# Altium PCB VLP.PcbDoc
Units mil, origin at the board's own origin, x right, y up, seen from the top; angles counter-clockwise.
Board outline 1968.5 x 1968.5 mil, 2 copper layers (Top Layer, Bottom Layer); 41 components, 41 nets, 190 pads, 40 vias.
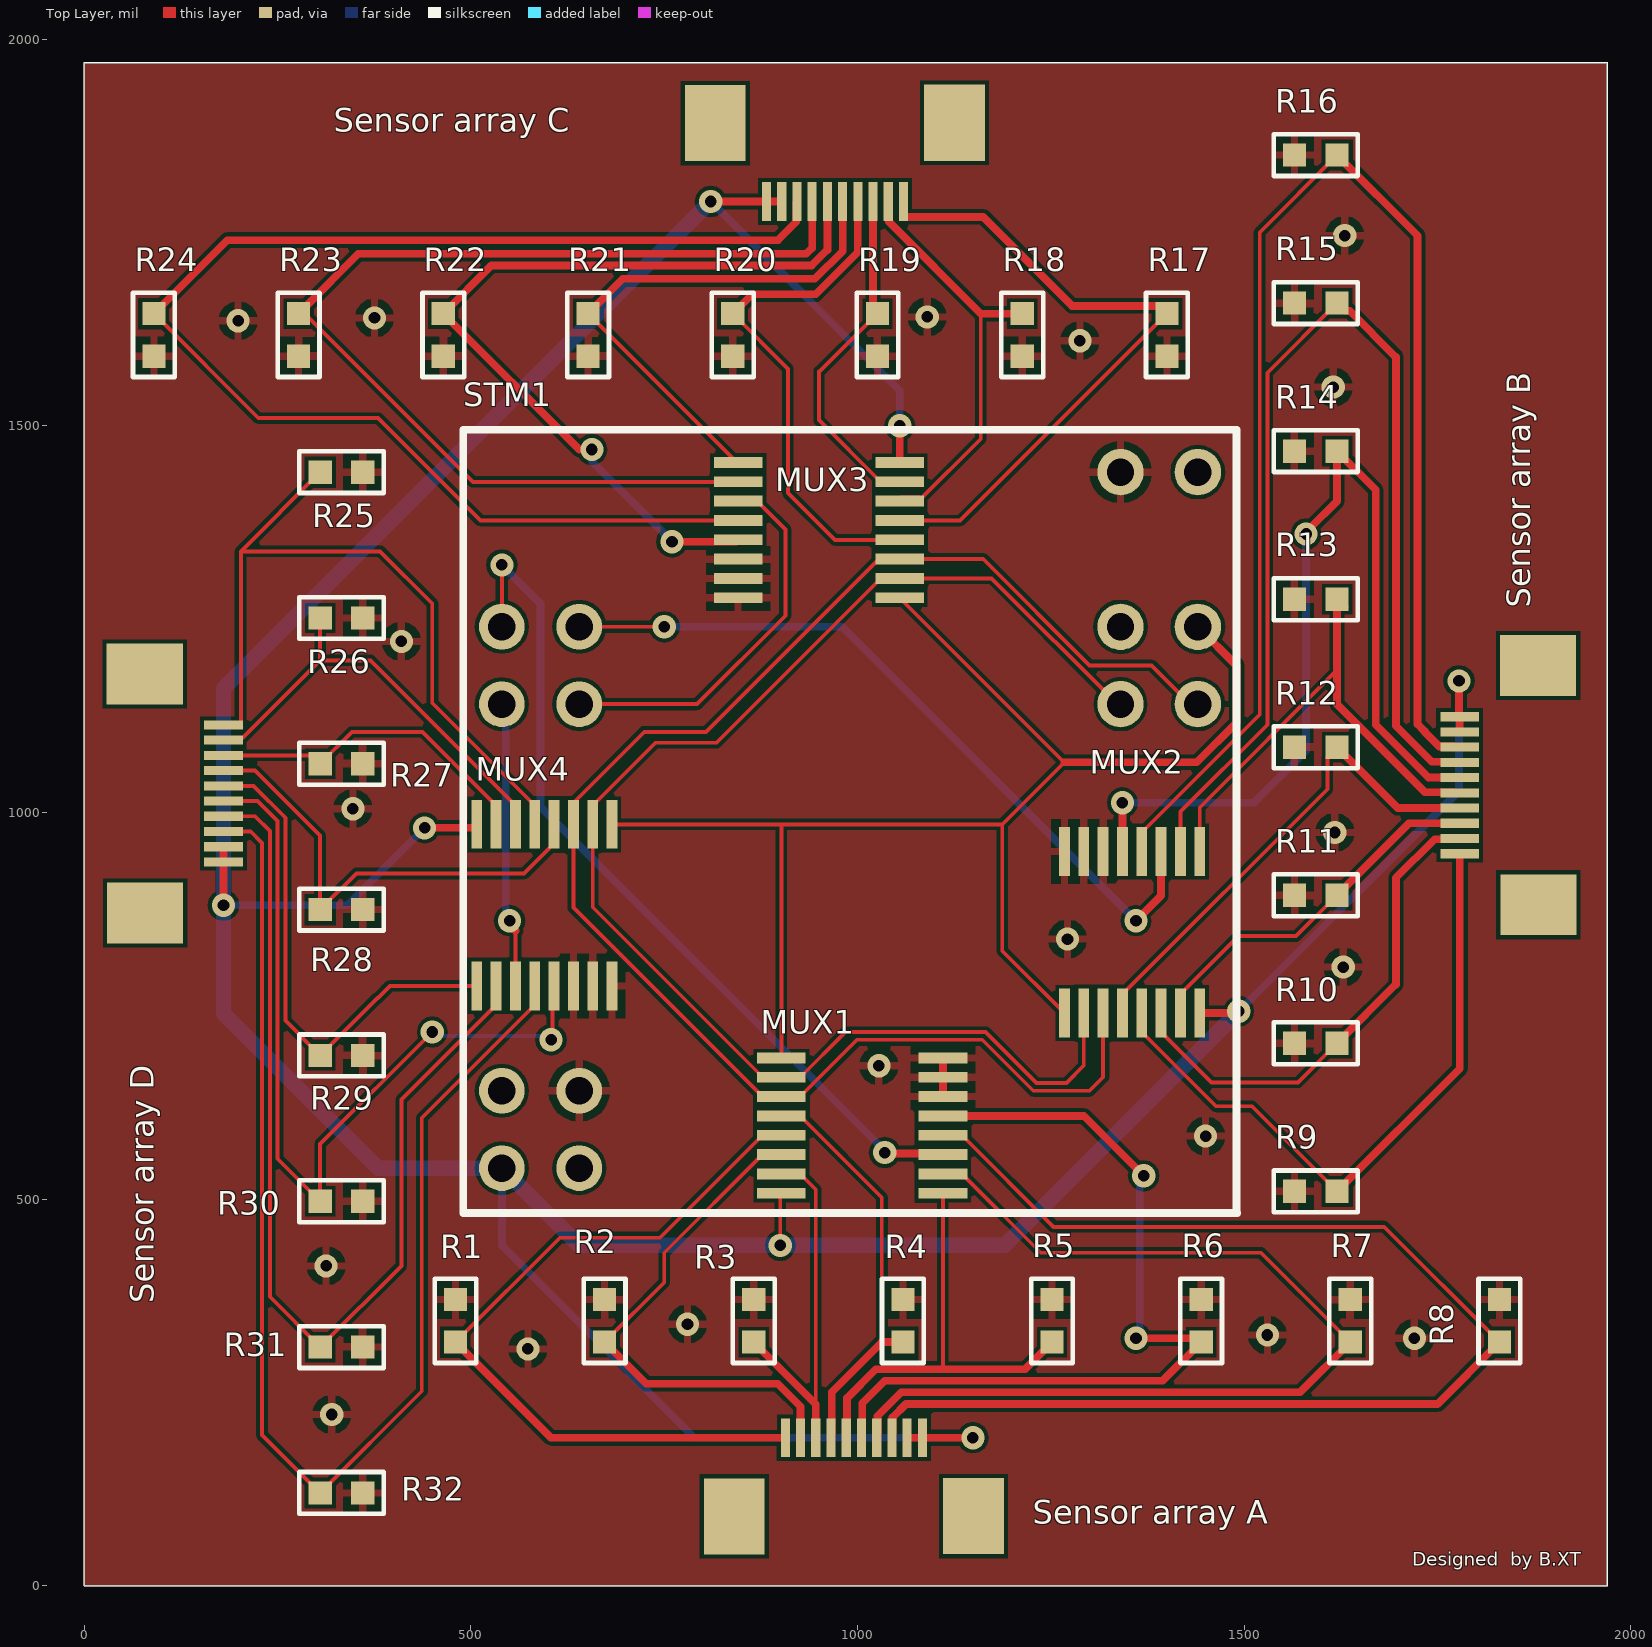
[diagram p0: Top Layer view]
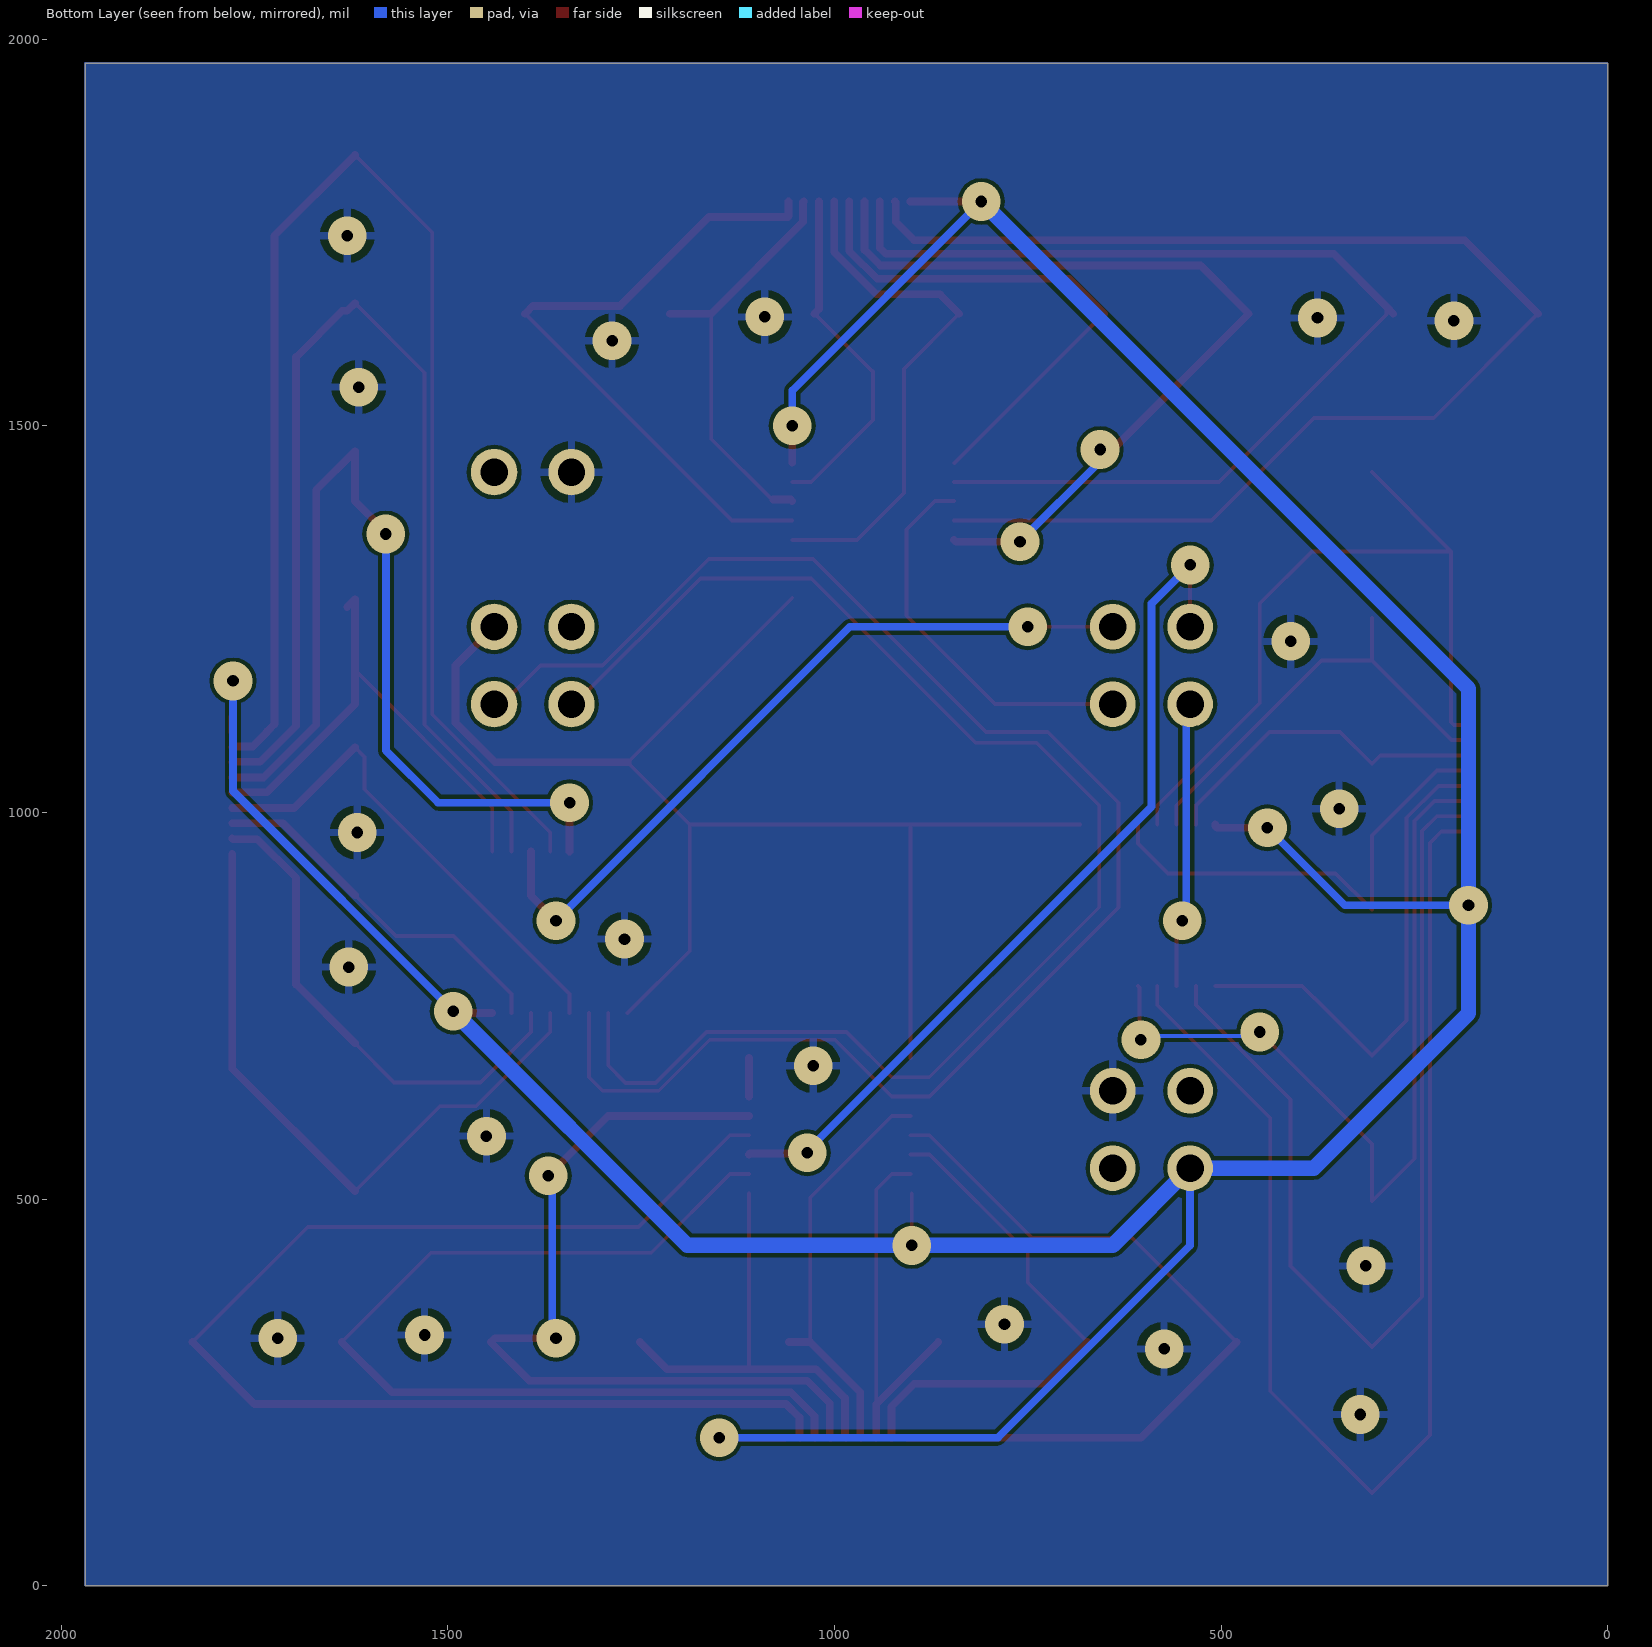
[diagram p1: Bottom Layer view, seen from below]
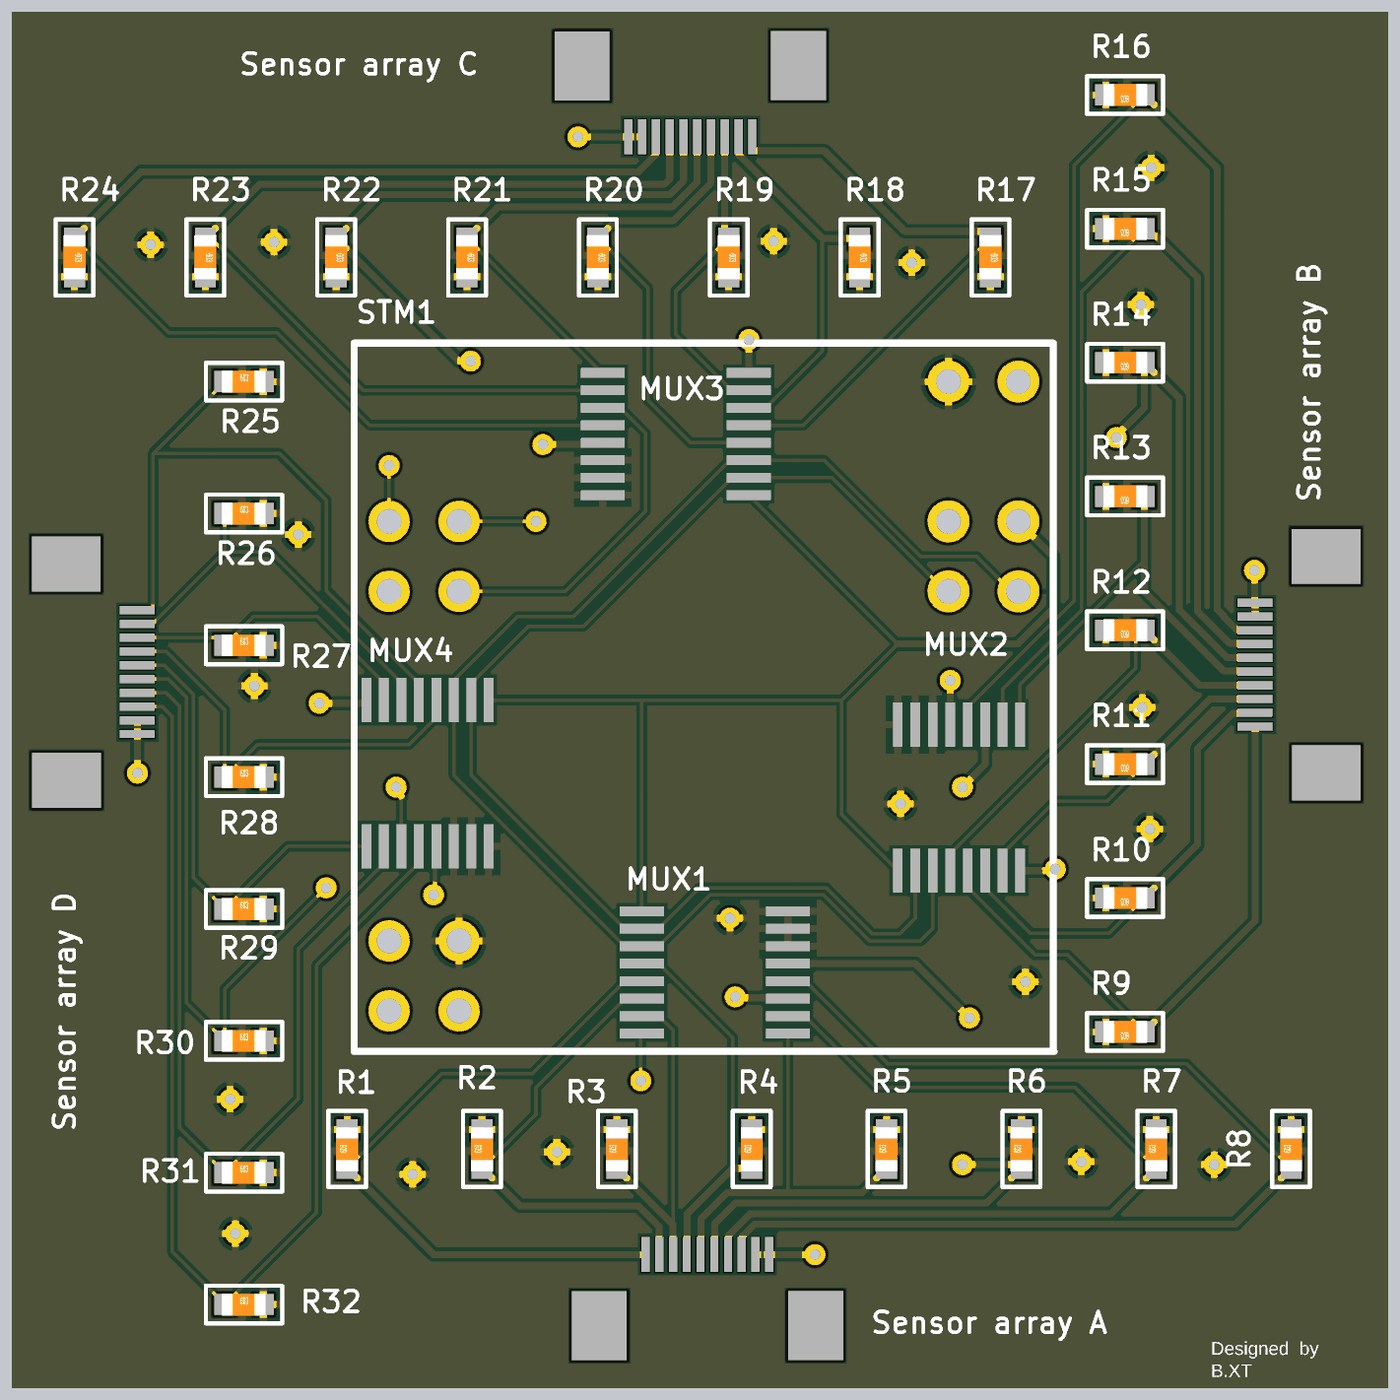
[diagram p2: 3D render of the assembled board from above, using the file's embedded part models]

## Layer stack, top to bottom
Top Solder: solder mask 0.4, Solder Resist, Dk 3.5
Top Layer: signal copper 1.4
Dielectric 1: dielectric 12.6, FR-4, Dk 4.8
Bottom Layer: signal copper 1.4
Bottom Solder: solder mask 0.4, Solder Resist, Dk 3.5

## Board outline
0,0 1968.5,0 1968.5,1968.5 0,1968.5

## Design rules (kind name [scope] priority, off if disabled: settings)
Clearance [All] p1: gap=5 ignorepadtopadclearanceinfootprint=FALSE
MinimumSolderMaskSliver [All] p1: minsoldermaskwidth=2
PolygonConnect [All] p1: connectstyle=Relief reliefconductorwidth=10 reliefentries=4 polygonreliefangle="90 Angle" airgapwidth=10
RoutingVias [All] p1: holewidth=28 width=50 viastyle="Through Hole" minholewidth=28 minwidth=50 maxholewidth=28 maxwidth=50
SilkToSilkClearance [All] p1: silktosilkclearance=3
SilkToSolderMaskClearance [IsPad] p1: minsilkscreentomaskgap=5 clearancetoexposedcopper=TRUE
SolderMaskExpansion [All] p1: expansion=4
Width [All] p1: maxlimit=20 minlimit=5 preferedwidth=10
27 further rules are at their usual default settings.

## Components (designator, comment, footprint, x,y, rotation, side; value= is the part's Value field where it differs from the comment)
MUX1 "MAX4581" MAX4581 1005.91,590 r180 top locked
MUX2 "MAX4581" MAX4581 1360,845 r270 top
MUX3 "MAX4581" MAX4581 950,1370 r0 top locked
MUX4 "MAX4581" MAX4581 590,880 r90 top locked
R1 "Res2" 0603c 480,315 r90 top value=10K
R2 "Res2" 0603c 672.86,315 r90 top value=10K
R3 "Res2" 0603c 865.71,315 r90 top value=10K
R4 "Res2" 0603c 1058.57,315 r90 top value=10K
R5 "Res2" 0603c 1251.43,315 r90 top value=10K
R6 "Res2" 0603c 1444.29,315 r90 top value=10K
R7 "Res2" 0603c 1637.14,315 r90 top value=10K
R8 "Res2" 0603c 1830,315 r90 top value=10K
R9 "Res2" 0603c 1620,510 r180 top value=10K
R10 "Res2" 0603c 1620,701.43 r180 top value=10K
R11 "Res2" 0603c 1620,892.86 r180 top value=10K
R12 "Res2" 0603c 1620,1084.29 r180 top value=10K
R13 "Res2" 0603c 1620,1275.71 r180 top value=10K
R14 "Res2" 0603c 1620,1467.14 r180 top value=10K
R15 "Res2" 0603c 1620,1658.57 r180 top value=10K
R16 "Res2" 0603c 1620,1850 r180 top value=10K
R17 "Res2" 0603c 1400,1645 r270 top value=10K
R18 "Res2" 0603c 1212.86,1645 r270 top value=10K
R19 "Res2" 0603c 1025.71,1645 r270 top value=10K
R20 "Res2" 0603c 838.57,1645 r270 top value=10K
R21 "Res2" 0603c 651.43,1645 r270 top value=10K
R22 "Res2" 0603c 464.29,1645 r270 top value=10K
R23 "Res2" 0603c 277.14,1645 r270 top value=10K
R24 "Res2" 0603c 90,1645 r270 top value=10K
R25 "Res2" 0603c 305,1440 r0 top value=10K
R26 "Res2" 0603c 305,1251.43 r0 top value=10K
R27 "Res2" 0603c 305,1062.86 r0 top value=10K
R28 "Res2" 0603c 305,874.29 r0 top value=10K
R29 "Res2" 0603c 305,685.71 r0 top value=10K
R30 "Res2" 0603c 305,497.14 r0 top value=10K
R31 "Res2" 0603c 305,308.57 r0 top value=10K
R32 "Res2" 0603c 305,120 r0 top value=10K
"Sensor array A" "FPC连接件" FPC连接器-10P 1194.09,7.72 r90 top locked
"Sensor array B" "FPC连接件" FPC连接器-10P 1962.28,1234.09 r180 top locked
"Sensor array C" "FPC连接件" FPC连接器-10P 771.85,1973.7 r270 top locked
"Sensor array D" "FPC连接件" FPC连接器-10P -3.7,825.59 r0 top locked
STM1 "MCU" STM32F103C8T6-4 540,1440 r0 top locked

## Footprints (in the part's own frame and the unit in brackets; to place one, negate y for a bottom-side part, rotate by r counter-clockwise, add the part's x,y. Pads: shape width x height; smd on the part's side, far side on the other; paste and mask are expansions set on the pad)
0603c [mil]
  rect 30x30 smd: 1(0,0) 2(55,0)
  silkscreen extent -27,-27 82,27, body extent -4,-16 59,16, height 12
FPC连接器-10P [mm]
  rect 1.27x0.3 smd mask+0.05: 1(4.666,7.303) 2(4.666,6.803) 3(4.666,6.303) 4(4.666,5.803) 5(4.666,5.303) 6(4.666,4.803) 7(4.666,4.303) 8(4.666,3.803) 9(4.666,3.303) 10(4.666,2.803)
  rect 2.5x2 smd: ""(2.08,8.98) ""(2.09,1.12)
MAX4581 [mil]
  rect 63x14 smd paste+0 mask+0: 1(-104.5,82.5) 2(-104.5,57.5) 3(-104.5,32.5) 4(-104.5,7.5) 5(-104.5,-17.5) 6(-104.5,-42.5) 7(-104.5,-67.5) 8(-104.5,-92.5) 9(104.5,-92.5) 10(104.5,-67.5) 11(104.5,-42.5) 12(104.5,-17.5) 13(104.5,7.5) 14(104.5,32.5) 15(104.5,57.5) 16(104.5,82.5)
STM32F103C8T6-4 [mm]
  round 1.5 hole 0.9: 5(0,-5.08) 6(2.54,-5.08) 7(0,-7.62) 8(2.54,-7.62) 17(0,-20.32) 18(2.54,-20.32) 19(0,-22.86) 20(2.54,-22.86)
  round 1.524 hole 0.899: 33(22.86,-7.62) 34(20.32,-7.62) 35(22.86,-5.08) 36(20.32,-5.08) 39(22.86,0) 40(20.32,0)
  silkscreen extent -1.27,-24.33 24.16,1.4

## Part data
R1 R2 R3 R4 R5 R6 R7 R8 R9 R10 R11 R12 R13 R14 R15 R16 R17 R18 R19 R20 R21 R22 R23 R24 R25 R26 R27 R28 R29 R30 R31 R32: "Resistor", LatestRevisionDate=17-Jul-2002, LatestRevisionNote="Re-released for DXP Platform.", PackageDescription="Axial Device, Thru-Hole; 2 Leads; 0.4 in Pin Spacing", PackageReference=AXIAL-0.4, Published=8-Jun-2000, Publisher="Altium Limited"
STM1: library part Component_1
MUX1 MUX2 MUX3 MUX4: MUX=MAX4581

## Via types
v1: diameter 30/50 (per signal layer), hole 15, Top Layer to Bottom Layer, 40 vias

## Nets (pads, with @x,y where several pads share a name; then routed paths per layer and width w, separated by ;. In a path a pad name is that pad's centre, name@x,y a point inside that pad or via, vN(x,y) a via of type N, cw(c..) or ccw(c..) an arc to the next point about the centre after c; other vN are vias at no path point)
+5V: "Sensor array A.9" "Sensor array A.10" "Sensor array B.9" "Sensor array B.10" "Sensor array C.9" "Sensor array C.10" "Sensor array D.9" "Sensor array D.10" MUX1.16 MUX2.16 MUX3.16 MUX4.16 STM1.19 | length 5510.1
  Top Layer w5: v1(900,440) MUX1.16@900,507.5
  Top Layer w10: v1(180,880) 180,935.94 180,955.63 ; v1(440,980) 505.5,980 507.5,982 MUX4.16 ; STM1.19 STM1.19@540,560 ; v1(810,1790) 882.2,1790 901.89,1790 ; MUX3.16 v1(1054.5,1500) ; 1064.06,191.42 1083.74,191.42 v1(1149.09,191.42) ; MUX2.16 1490.5,740.5 v1(1492.88,742.88) ; v1(1777.68,1170) 1777.68,1124.65 1778.58,1123.74 1778.58,1104.06 1778.13,1104.51
  Bottom Layer w10: v1(180,880) 340,880 v1(440,980) ; STM1.19@540,550 STM1.19 540,440 788.58,191.42 v1(1149.09,191.42) ; v1(810,1790) 1054.5,1545.5 v1(1054.5,1500) ; v1(1492.88,742.88) 1777.68,1027.68 v1(1777.68,1170)
  Bottom Layer w20: v1(810,1790) 180,1160 v1(180,880) 180,740 380,540 STM1.19 640,440 v1(900,440) 1190,440 v1(1492.88,742.88)
A: MUX1.11 MUX2.11 MUX3.11 MUX4.11 STM1.33 | length 2085.5
  Top Layer w5: MUX2.11 1317.5,657.5 1300,640 1227.13,640 1161.13,706 999.41,706 925.91,632.5 MUX1.11 876.91,632.5 632.5,876.91 MUX4.11 632.5,1012.5 724.06,1104.06 804.06,1104.06 1027.5,1327.5 MUX3.11 1162.5,1327.5 1300,1190 1380,1190 1430,1140 STM1.33
B: MUX1.10 MUX2.10 MUX3.10 MUX4.10 STM1.34 | length 1858
  Top Layer w5: MUX2.10 1292.5,672.5 1270,650 1231.27,650 1165.27,716 984.41,716 925.91,657.5 MUX1.10 877.3,657.5 657.5,877.3 MUX4.10 657.5,1009 738.5,1090 817.5,1090 1030,1302.5 MUX3.10 1173.36,1302.5 1335.86,1140 STM1.34
C: MUX1.9 MUX2.9 MUX3.9 MUX4.9 STM1.35 | length 1887.5
  Top Layer w5: MUX4.9 900,984.5 ; MUX1.9 901.41,983.09 900,984.5 ; MUX3.9 1267.31,1064.69 1187.13,984.5 ; MUX2.9 1187.13,820.87 1187.13,984.5 ; 900,984.5 1187.13,984.5
  Top Layer w10: 1267.31,1064.69 1438.65,1064.69 1490,1116.04 1490,1190 STM1.35
GND: MUX1.6 MUX1.7 MUX1.8 MUX2.6 MUX2.7 MUX2.8 MUX3.6 MUX3.7 MUX3.8 MUX4.6 MUX4.7 MUX4.8 R1.2 R2.2 R3.2 R4.2 R5.2 R6.2 R7.2 R8.2 R9.2 R10.2 R11.2 R12.2 R13.2 R14.2 R15.2 R16.2 R17.2 R18.2 R19.2 R20.2 R21.2 R22.2 R23.2 R24.2 R25.2 R26.2 R27.2 R28.2 R29.2 R30.2 R31.2 R32.2 STM1.18 STM1.40 | length 50
  Top Layer w10: MUX1.6 MUX1.7 MUX1.8
  other v1: 320,221.42 573.64,306.16 1720,320 1530,324.19 780,338.19 312.65,413.57 1450,581.4 1027.5,672.5 1627.96,800 1271.43,836.18 1617.14,974 347.35,1004.7 410,1221.16 1615.15,1550 1287.5,1609.97 198.84,1635.81 375.31,1639.42 1090,1640.81 1630,1745.86
SA: MUX1.3 STM1.5 | length 1119
  Top Layer w5: STM1.5 v1(540,1320)
  Top Layer w10: v1(1035,560) 1036.25,558.75 1109.16,558.75 MUX1.3
  Bottom Layer w10: v1(540,1320) 590,1270 590,1007.5 v1@1035,562.5
SA1: "Sensor array A.1" MUX1.13 R1.1 | length 1010
  Top Layer w5: R1.1 615,450 744.41,450 876.91,582.5 MUX1.13
  Top Layer w10: R1.1 603.58,191.42 906.58,191.42
SA2: "Sensor array A.2" MUX1.14 R2.1 | length 679.5
  Top Layer w5: R2.1 750,392.14 750,430.59 876.91,557.5 MUX1.14
  Top Layer w10: R2.1 726.72,261.14 896.54,261.14 926.26,231.42 926.26,191.42
SA3: "Sensor array A.3" MUX1.15 R3.1 | length 487.3
  Top Layer w5: MUX1.15 925.91,532.5 945.95,512.46 945.95,234.77
  Top Layer w10: R3.1 945.95,234.77 945.95,191.42
SA4: "Sensor array A.4" MUX1.12 R4.1 | length 538.7
  Top Layer w5: MUX1.12 925.91,607.5 1031.22,502.19 1031.22,315
  Top Layer w10: 965.63,191.42 966.54,192.32 966.54,250.31 1031.22,315 R4.1
SA5: "Sensor array A.5" MUX1.1 R5.1 | length 574.4
  Top Layer w5: 1110,280 1110.41,280.41 MUX1.1
  Top Layer w10: 985.32,191.42 986.22,192.32 986.22,242.56 1023.66,280 1110,280 1216.43,280 R5.1
SA6: "Sensor array A.6" MUX1.5 R6.1 | length 1108.2
  Top Layer w10: 1005,191.42 1005.91,192.32 1005.91,235.91 1035,265 1394.29,265 R6.1 1439.29,320 v1(1360,320) ; MUX1.5 1292.5,607.5 v1(1370,530)
  Bottom Layer w10: v1(1360,320) 1365,325 1365,525 v1(1370,530)
SA7: "Sensor array A.7" MUX1.2 R7.1 | length 1296.2
  Top Layer w5: MUX1.2 1134.91,532.5 1236.81,430.59 1521.55,430.59 R7.1
  Top Layer w10: 1024.69,191.42 1025.59,192.32 1025.59,219.21 1056.38,250 1572.14,250 R7.1
SA8: "Sensor array A.8" MUX1.4 R8.1 | length 1682.1
  Top Layer w5: MUX1.4 1134.91,582.5 1253.41,464 1681,464 R8.1
  Top Layer w10: 1044.37,191.42 1045.28,192.32 1045.28,217.69 1062.59,235 1750,235 R8.1
SB: MUX2.3 STM1.6 | length 980.4
  Top Layer w5: STM1.6 v1(750,1240)
  Top Layer w10: v1(1360,860) 1392.5,892.5 MUX2.3
  Bottom Layer w10: v1(750,1240) 980,1240 v1(1360,860)
SB1: "Sensor array B.1" MUX2.13 R9.1 | length 864.6
  Top Layer w5: MUX2.13 1367.5,716 1463.5,620 1510,620 R9.1
  Top Layer w10: R9.1 1778.58,668.58 1778.58,946.58
SB2: "Sensor array B.2" MUX2.14 R10.1 | length 649
  Top Layer w5: MUX2.14 1392.5,716 1457.79,650.71 1569.29,650.71 R10.1
  Top Layer w10: R10.1 1696.16,777.59 1696.16,915.3 1746.21,965.35 1777.68,965.35 1778.58,966.26
SB3: "Sensor array B.3" MUX2.15 R11.1 | length 477.1
  Top Layer w5: MUX2.15 1417.5,765 1492.5,840 1567.14,840 R11.1
  Top Layer w10: R11.1 1713.09,985.95 1778.58,985.95
SB4: "Sensor array B.4" MUX2.12 R12.1 | length 649.9
  Top Layer w5: MUX2.12 1342.5,765 1607.5,1030 1607.5,1071.79 R12.1
  Top Layer w10: R12.1 1698.66,1005.63 1778.58,1005.63
SB5: "Sensor array B.5" MUX2.1 R13.1 | length 664
  Top Layer w5: MUX2.1 1442.5,1006.55 1620,1184.05
  Top Layer w10: R13.1@1630,1265.71 R13.1 1620,1184.05 1620,1180 1620,1140 1733.78,1026.22 1777.68,1026.22 1778.58,1025.32
SB6: "Sensor array B.6" MUX2.5 R14.1 | length 1236.2
  Top Layer w10: MUX2.5 v1(1342.5,1012.5) ; v1@1583.42,1365.92 1620,1402.5 R14.1 1670,1417.14 1670,1113.42 1738.42,1045 1778.58,1045
  Bottom Layer w10: v1(1342.5,1012.5) 1512.5,1012.5 1580,1080 v1(1580,1360)
SB7: "Sensor array B.7" MUX2.2 R15.1 | length 1476.9
  Top Layer w5: MUX2.2 1417.5,1000.92 1530,1113.42 1530,1568.57 R15.1
  Top Layer w10: R15.1 1630,1648.57 1636.43,1648.57 1696.16,1588.84 1696.16,1111.91 1742.47,1065.59 1777.68,1065.59 1778.58,1064.69
SB8: "Sensor array B.8" MUX2.4 R16.1 | length 1851.3
  Top Layer w5: MUX2.4 1367.5,974 1520,1126.5 1520,1750 R16.1
  Top Layer w10: R16.1 1724.14,1745.86 1724.14,1114.14 1733.78,1104.51 1733.78,1103.81 1752.31,1085.28 1777.68,1085.28 1778.58,1084.37
SC: MUX4.3 STM1.7 | length 371.7
  Top Layer w5: MUX4.3 v1@557.5,847.09
  Top Layer w10: v1(550,860) 550,854.59 v1@557.5,847.09
  Bottom Layer w10: STM1.7 545,1135 545,865 v1(550,860)
SC1: "Sensor array D.1" MUX4.13 R25.1 | length 1005.7
  Top Layer w5: 180,1113.11 199.09,1113.11 202.5,1116.52 202.5,1337.5 ; R25.1 202.5,1337.5 ; MUX4.13 582.5,1009 450,1141.5 450,1270 382.5,1337.5 202.5,1337.5
SC2: "Sensor array D.2" MUX4.14 R26.1 | length 577.3
  Top Layer w5: 180,1093.42 201.83,1093.42 305,1196.6 ; R26.1 305,1196.6 ; MUX4.14 557.5,1009 369.9,1196.6 305,1196.6
SC3: "Sensor array D.3" MUX4.15 R27.1 | length 437.9
  Top Layer w5: 180,1073.74 294.12,1073.74 R27.1 346.2,1104.06 437.44,1104.06 532.5,1009 MUX4.15
SC4: "Sensor array D.4" MUX4.12 R28.1 | length 618
  Top Layer w5: 180,1054.05 220.95,1054.05 305,970 R28.1 351.86,921.14 568.64,921.14 607.5,960 MUX4.12
SC5: "Sensor array D.5" MUX4.1 R29.1 | length 662.8
  Top Layer w5: 180,1034.37 218.64,1034.37 260,993.01 260,730.71 R29.1 379.29,760 380,760 395.5,775.5 MUX4.1
SC6: "Sensor array D.6" MUX4.5 R30.1 | length 1103
  Top Layer w5: 180,1014.68 224.18,1014.68 250,988.87 250,552.14 R30.1 305,571 v1(450,716) ; v1(603.58,706) 605.54,707.96 605.54,773.54 MUX4.5
  Bottom Layer w5: v1(450,716) 455,711 598.58,711 v1(603.58,706)
SC7: "Sensor array D.7" MUX4.2 R31.1 | length 1323.4
  Top Layer w5: 180,995 220.95,995 240,975.95 240,373.57 R31.1 410,413.57 410,628.5 532.5,751 MUX4.2
SC8: "Sensor array D.8" MUX4.4 R32.1 | length 1698.2
  Top Layer w5: 180,975.31 215.23,975.31 230,960.55 230,195 R32.1 436.43,251.43 436.43,604.93 582.5,751 MUX4.4
SD: MUX3.3 STM1.8 | length 501.7
  Top Layer w5: STM1.8 792.2,1140 906.58,1254.37 906.58,1365.92 870,1402.5 MUX3.3
SD1: "Sensor array C.1" MUX3.13 R17.1 | length 868.2
  Top Layer w5: MUX3.13 1132.5,1377.5 R17.1
  Top Layer w10: 1059.37,1790 1059.37,1770.91 1060.28,1770 1162.32,1770 1277.32,1655 1390,1655 R17.1
SD2: "Sensor array C.2" MUX3.14 R18.1 | length 573.7
  Top Layer w5: MUX3.14 1079,1402.5 1159.32,1482.82 1159.32,1645
  Top Layer w10: 1039.68,1790 1040.59,1789.09 1040.59,1763.73 1159.32,1645 R18.1 ; MUX3.14 1056.5,1404.5 MUX3.14@1079,1404.5
SD3: "Sensor array C.3" MUX3.15 R19.1 | length 454.3
  Top Layer w5: R19.1 950.71,1570 950,1570 950,1507.5 1030,1427.5 MUX3.15
  Top Layer w10: 1020,1790 1020,1650.71 R19.1
SD4: "Sensor array C.4" MUX3.12 R20.1 | length 691.3
  Top Layer w5: R20.1 910,1573.57 910,1413.21 970.71,1352.5 MUX3.12
  Top Layer w10: R20.1 863.57,1670 945.95,1670 1000.32,1724.37 1000.32,1790
SD5: "Sensor array C.5" MUX3.1 R21.1 | length 700.2
  Top Layer w5: R21.1 MUX3.1@844.71,1451.71
  Top Layer w10: R21.1 696.43,1690 944.73,1690 980.63,1725.9 980.63,1790
SD6: "Sensor array C.6" MUX3.5 R22.1 | length 1090.6
  Top Layer w10: v1@640,1469.29 R22.1 526.63,1707.35 940.86,1707.35 960.94,1727.43 960.94,1790 ; v1(760,1350) 843,1350 MUX3.5
  Bottom Layer w10: v1(656.43,1469.29) 656.43,1454.29 760,1350.71 v1(760,1350)
SD7: "Sensor array C.7" MUX3.2 R23.1 | length 1418.4
  Top Layer w5: R23.1@286.07,1653.93 286.07,1643.93 502.5,1427.5 MUX3.2
  Top Layer w10: R23.1 286.07,1653.93 354.49,1722.35 933.61,1722.35 941.26,1730 941.26,1790
SD8: "Sensor array C.8" MUX3.4 R24.1 | length 1772.8
  Top Layer w5: R24.1 225,1510 380,1510 512.5,1377.5 MUX3.4
  Top Layer w10: R24.1 185,1740 896.94,1740 920.67,1763.73 920.67,1789.09 921.58,1790
pads on no net: "Sensor array A." "Sensor array B." "Sensor array C." "Sensor array D." STM1.17 STM1.20 STM1.36 STM1.39

## Polygon pours and split planes (outlines as drawn)
GND on Top Layer "GND_L01_P000" (solid, pour order 0): 0,1970 1970,1970 1970,0 0,0
no net on Top Layer "Top Layer-No Net" (solid, pour order 2): -30,2030
GND on Bottom Layer "GND_L02_P004" (solid, pour order 4): 0,1970 1970,1970 1970,0 0,0

## Silkscreen, mask and mechanical layers (free items; w line width, h text height)
Top Overlay:
  lines w1: 0,0 0,1970 1970,1970 1970,0 0,0
  text "Designed  by B.XT" at 1717.31,20 h30